# Altium PCB PCB1.PcbDoc
Units mm, origin at the board's own origin, x right, y up, seen from the top; angles counter-clockwise.
Board outline 114.13 x 114.13 mm, 2 copper layers (Top Layer, Bottom Layer); 39 components, 37 nets, 155 pads, 32 vias.
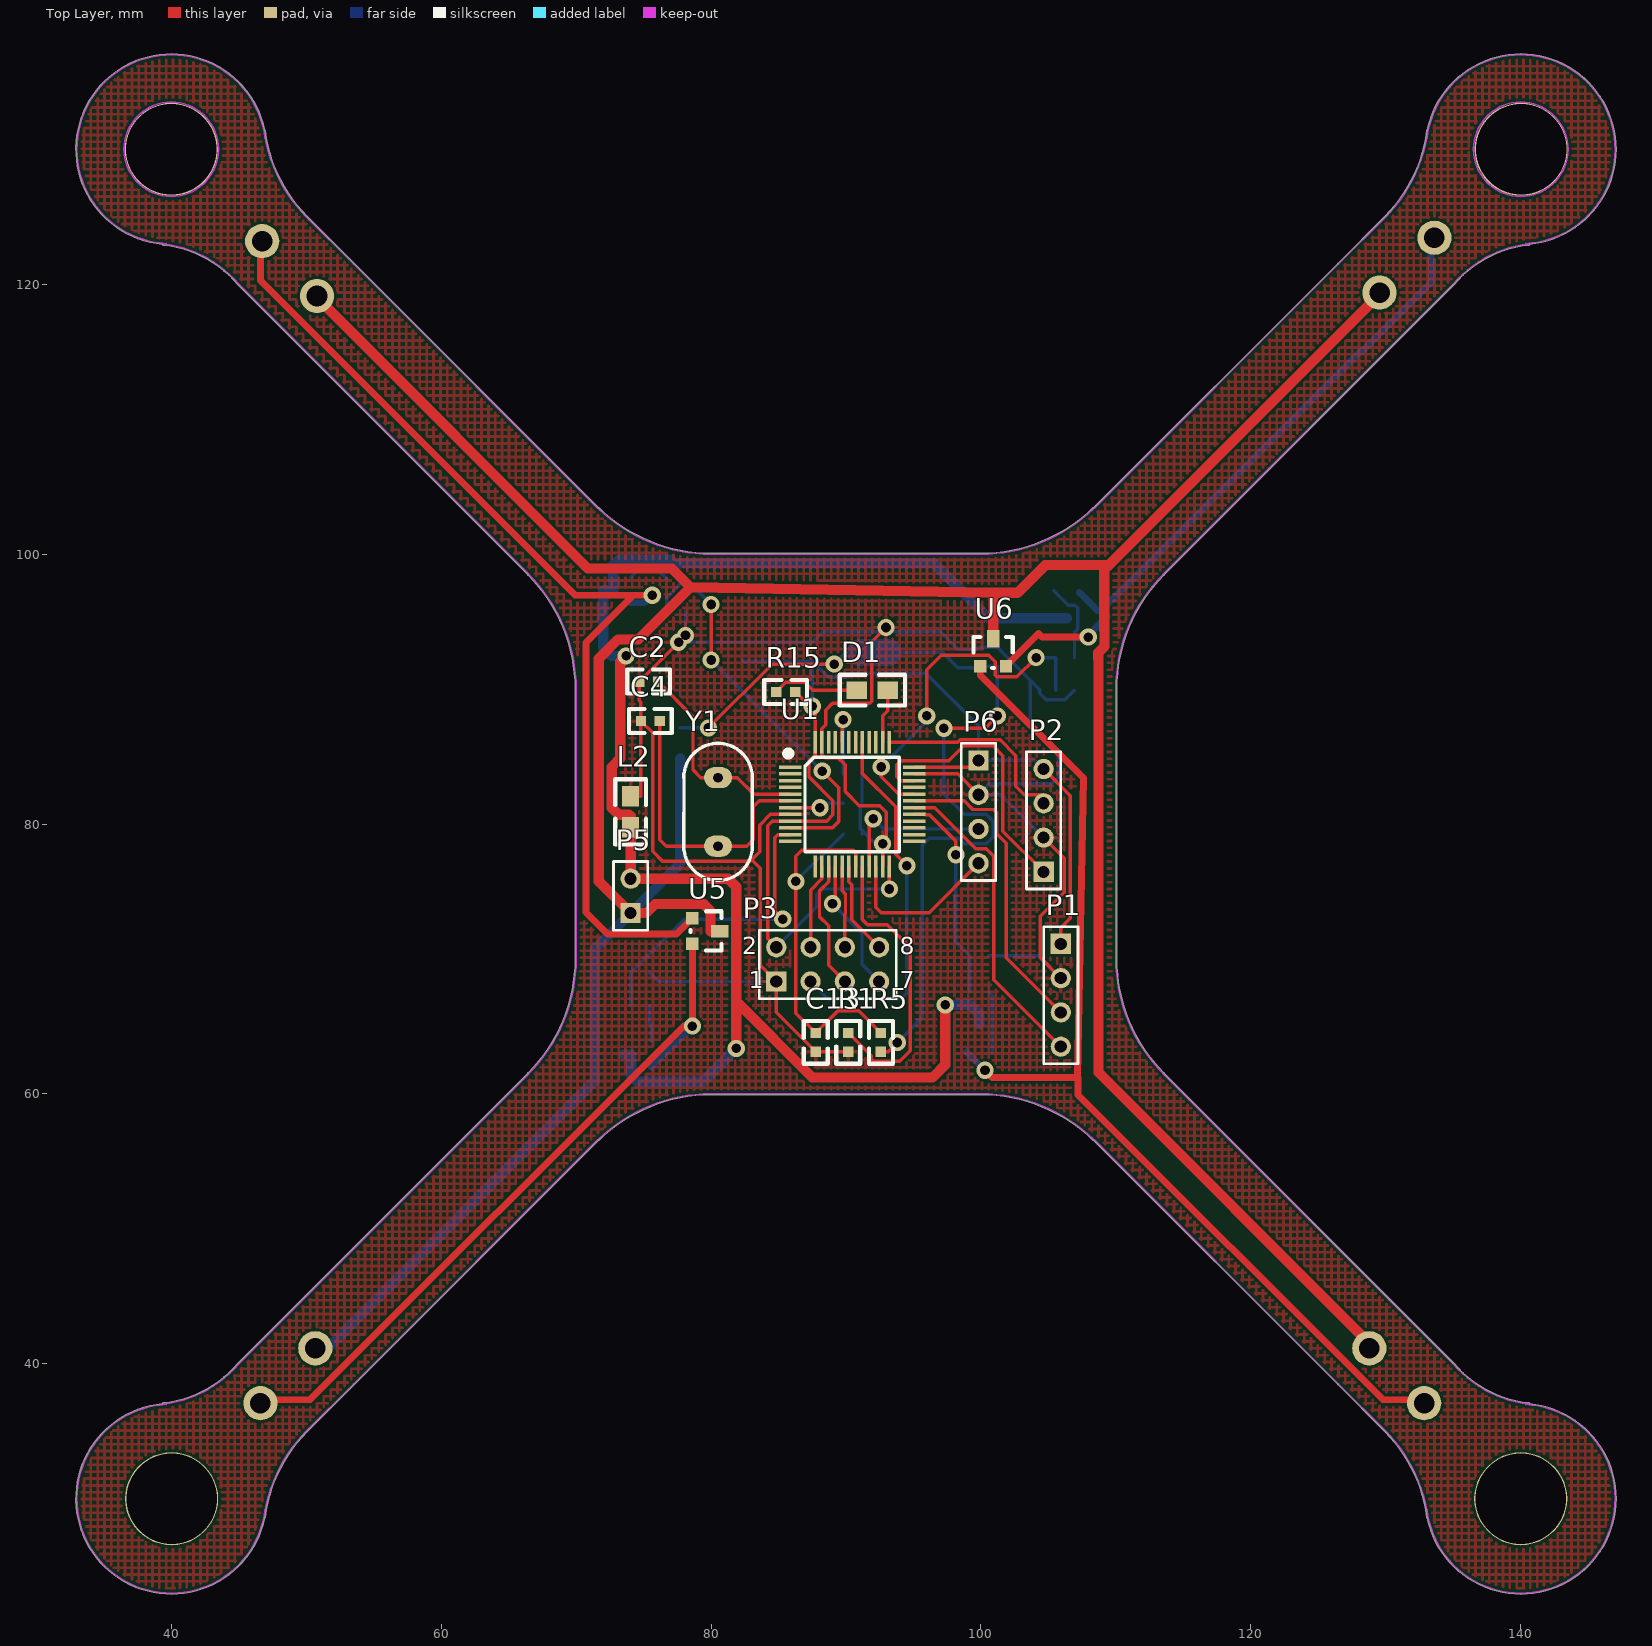
[diagram p0: Top Layer view]
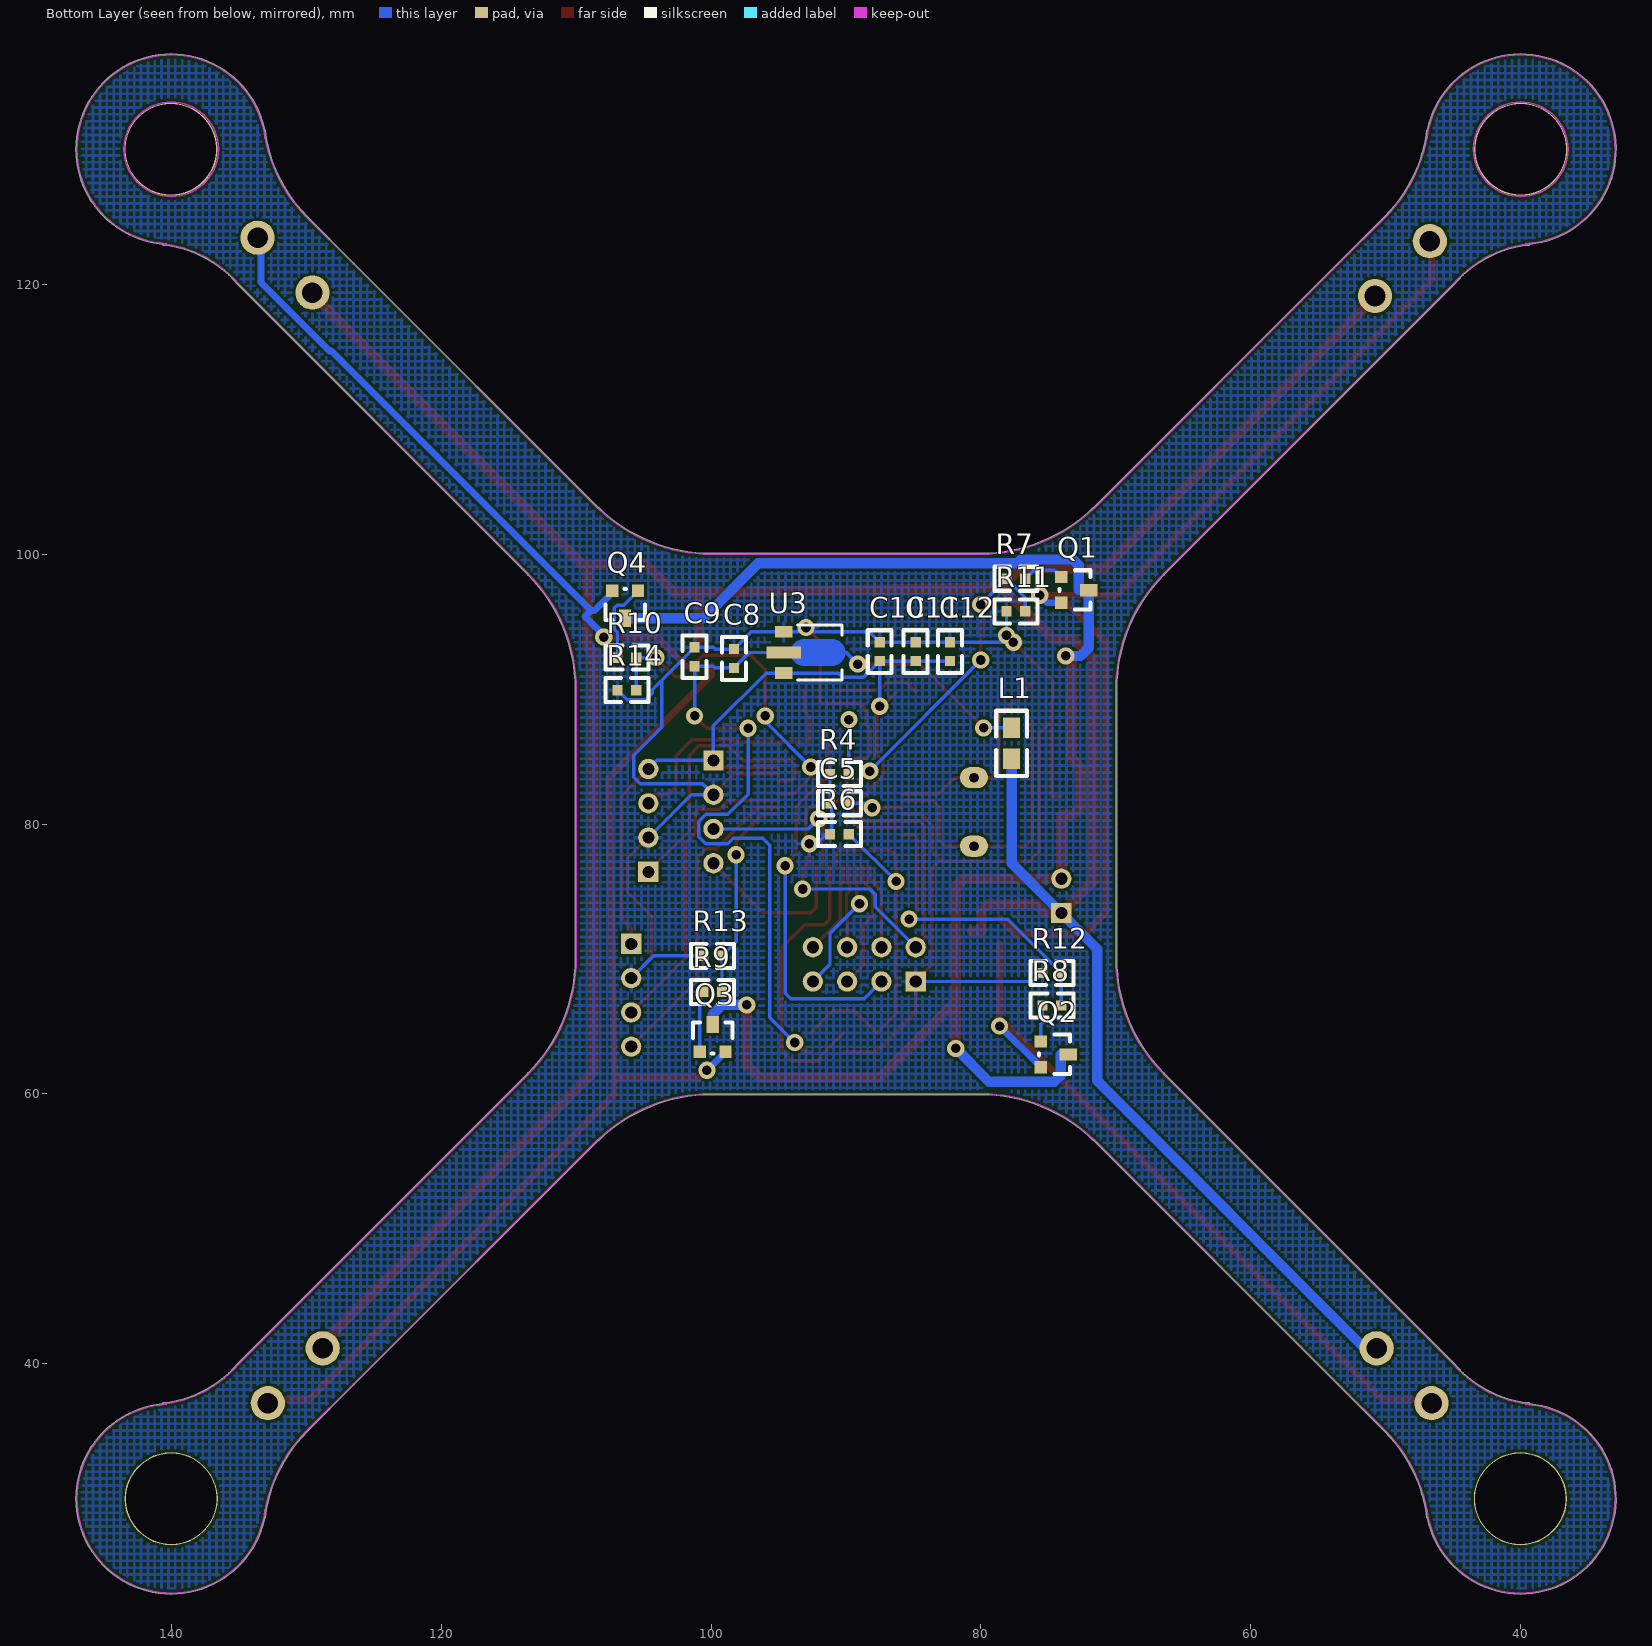
[diagram p1: Bottom Layer view, seen from below]

## Layer stack, top to bottom
Top Solder: solder mask 0.0102, Solder Resist, Dk 3.5
Top Layer: signal copper 0.0356
Dielectric 1: dielectric 0.32, FR-4, Dk 4.8
Bottom Layer: signal copper 0.0356
Bottom Solder: solder mask 0.0102, Solder Resist, Dk 3.5

## Board outline
39.333,37.032 ccw(c40,30) 46.92,28.583 ccw(c46.892,28.64) 46.955,28.632 cw(c57.9,27.2) 50.044,34.954 cw(c57.9,27.2) 50.045,34.955 71.636,56.545 ccw(c71.64,56.609) 71.685,56.563 cw(c80,48) 79.998,59.936 cw(c80,48) 80,59.936 cw(c80,60) 79.998,59.936 80,59.936 100,59.936 ccw(c100,60) 100.002,59.936 cw(c100,48) 108.315,56.563 ccw(c108.36,56.609) 108.364,56.545 126.455,38.455 129.955,34.955 ccw(c130,35) 129.956,34.954 cw(c122.1,27.2) 133.045,28.632 ccw(c133.108,28.64) 133.08,28.583 ccw(c140,30) 147.064,30 ccw(c140,30) 140.667,37.032 ccw(c140.603,37.033) 140.667,37.033 ccw(c140.603,37.033) 140.61,37.096 cw(c141.5,45.5) 135.049,40.041 ccw(c135,40) 135.045,40.045 113.581,61.51 ccw(c113.517,61.513) 113.581,61.513 ccw(c113.517,61.513) 113.562,61.558 cw(c122,70) 110.064,70 ccw(c110,70) 110.064,70.002 110.064,90 cw(c122,90) 113.562,98.442 ccw(c113.517,98.487) 113.581,98.487 ccw(c113.517,98.487) 113.581,98.49 135.044,119.954 ccw(c135,120) 135.049,119.959 cw(c141.5,114.5) 140.61,122.904 ccw(c140.603,122.967) 140.667,122.967 ccw(c140.603,122.967) 140.667,122.968 ccw(c140,130) 147.064,130 ccw(c140,130) 133.08,131.417 ccw(c133.108,131.36) 133.045,131.368 cw(c122.1,132.8) 129.955,125.046 cw(c122.1,132.8) 129.955,125.045 cw(c130,125) 129.955,125.046 129.955,125.045 126.455,121.545 108.364,103.455 ccw(c108.36,103.391) 108.315,103.437 cw(c100,112) 100.001,100.064 ccw(c100,100) 100,100.064 80,100.064 ccw(c80,100) 79.999,100.064 ccw(c80,112) 80,100.064 79.999,100.064 cw(c80,112) 71.685,103.437 ccw(c71.64,103.391) 71.636,103.455 50.045,125.045 ccw(c50,125) 50.045,125.045 cw(c57.9,132.8) 46.955,131.368 ccw(c46.892,131.36) 46.92,131.417 ccw(c40,130) 39.333,122.968 ccw(c39.397,122.967) 39.39,122.904 cw(c38.5,114.5) 44.951,119.959 ccw(c45,120) 44.956,119.954 44.955,119.955 44.956,119.954 66.419,98.49 ccw(c66.483,98.487) 66.438,98.442 cw(c58,90) 69.936,90 69.936,70 cw(c70,70) 69.936,70.001 69.936,70 cw(c58,70) 66.438,61.558 ccw(c66.483,61.513) 66.419,61.51 44.955,40.045 ccw(c45,40) 44.951,40.041 ccw(c38.5,45.5) 44.951,40.041 cw(c45,40) 44.955,40.045 44.951,40.041 cw(c38.5,45.5) 39.39,37.096 ccw(c39.397,37.033)

## Design rules (kind name [scope] priority, off if disabled: settings)
Clearance [All] p1: gap=0.198
PolygonConnect [All] p1: connectstyle=Relief reliefconductorwidth=0.254 reliefentries=4 polygonreliefangle="90 Angle" airgapwidth=0.254
RoutingVias [All] p1: holewidth=0.711 width=1.27 viastyle="Through Hole" minholewidth=0.711 minwidth=1.27 maxholewidth=0.711 maxwidth=1.27
SolderMaskExpansion [All] p1: expansion=0.102
UnpouredPolygon [All] p1: allowunpoured=FALSE
Width Width_5 [InNet('MOTO4')] p1: maxlimit=0.508 minlimit=0.508 preferedwidth=0.508
Width Width_4 [InNet('MOTO3')] p2: maxlimit=0.508 minlimit=0.508 preferedwidth=0.508
Width Width_3 [InNet('MOTO2')] p3: maxlimit=0.508 minlimit=0.508 preferedwidth=0.508
Width Width_2 [InNet('MOTO1')] p4: maxlimit=0.508 minlimit=0.508 preferedwidth=0.508
Width Width_1 [InNet('VCC_BAT')] p5: maxlimit=0.762 minlimit=0.762 preferedwidth=0.762
Width [InNet('GND_BAT')] p6: maxlimit=0.762 minlimit=0.762 preferedwidth=0.762
29 further rules are at their usual default settings.

## Components (designator, comment, footprint, x,y, rotation, side; value= is the part's Value field where it differs from the comment)
C2 "cap" 0603 74.676,90.551 r0 top
C4 "cap" 0603 74.803,87.63 r0 top
C5 "cap" 0603 91.186,81.534 r180 bottom
C8 "cap" 0603 98.298,92.964 r270 bottom
C9 "cap" 0603 101.219,93.091 r270 bottom
C10 "cap" 0603 87.503,93.472 r270 bottom
C11 "cap" 0603 84.836,93.472 r270 bottom
C12 "cap" 0603 82.296,93.472 r270 bottom
C13 "cap" 0603 87.757,63.119 r90 top
D1 "LED0" 0805 90.805,89.916 r0 top
L1 "Inductor" 0805 77.724,84.836 r90 bottom
L2 "Inductor10mH" 0805 74.041,82.042 r270 top
P1 "Header 4" HDR1X4 105.918,71.12 r270 top
P2 "Header 4" HDR1X4 104.648,76.454 r90 top
P3 "Header 4X2" HDR2X4 84.836,68.326 r0 top
P5 "Header 2" HDR1X2 74.041,73.406 r90 top
P6 "Header 4" HDR1X4 99.822,84.709 r270 top
Q1 "SI2302" SOT-23 74.041,98.298 r270 bottom
Q2 "SI2302" SOT-23 75.565,63.881 r270 bottom
Q3 "SI2302" SOT-23 100.838,63.119 r180 bottom
Q4 "SI2302" SOT-23 105.41,97.282 r0 bottom
R1 "res" 0603 90.17,64.516 r270 top
R4 "res" 0603 91.186,83.693 r180 bottom
R5 "res" 0603 92.583,63.119 r90 top
R6 "res" 0603 89.789,79.248 r0 bottom
R7 "res" 0603 78.105,98.171 r180 bottom
R8 "res" 0603 74.041,66.548 r0 bottom
R9 "res" 0603 99.187,67.564 r0 bottom
R10 "res" 0603 105.537,92.329 r0 bottom
R11 "res" 0603 78.105,95.758 r180 bottom
R12 "res" 0603 75.438,68.961 r180 bottom
R13 "res" 0603 100.584,70.231 r180 bottom
R14 "res" 0603 106.934,89.916 r180 bottom
R15 "res" 0603 86.233,89.789 r180 top
U1 "STM32F103C8T6" LQFP48S 85.852,84.201 r0 top
U3 "XC6203E" SOT-89 94.615,94.234 r270 bottom
U5 "BAT54C" SOT-23 78.613,73.025 r270 top
U6 "BAT54C" SOT-23 99.949,91.694 r0 top
Y1 "5032xtal" XTAL 80.518,80.899 r90 top

## Footprints (in the part's own frame and the unit in brackets; to place one, negate y for a bottom-side part, rotate by r counter-clockwise, add the part's x,y. Pads: shape width x height; smd on the part's side, far side on the other; paste and mask are expansions set on the pad)
0603 [mil]
  rect 30x30 smd: 1(0,0) 2(55,0)
  silkscreen extent -35,-35 90,35
0805 [mil]
  rect 60x50 smd: 1(0,0) 2(90,0)
  silkscreen extent -50,-45 140,45
HDR1X2 [mm] "Connector; Header; 2 Position"
  rect 1.5x1.5 hole 0.9: 1(0,0)
  round 1.5 hole 0.9: 2(2.54,0)
  silkscreen extent -1.27,-1.27 3.81,1.27
HDR1X4 [mm] "Connector; Header; 4 Position"
  rect 1.5x1.5 hole 0.9: 1(0,0)
  round 1.5 hole 0.9: 2(2.54,0) 3(5.08,0) 4(7.62,0)
  silkscreen extent -1.27,-1.27 8.89,1.27
HDR2X4 [mm] "Connector; Header; 4x2 Position"
  rect 1.5x1.5 hole 0.9: 1(0,0)
  round 1.5 hole 0.9: 2(0,2.54) 3(2.54,0) 4(2.54,2.54) 5(5.08,0) 6(5.08,2.54) 7(7.62,0) 8(7.62,2.54)
  silkscreen extent -1.27,-1.27 8.89,3.81
LQFP48S [mil] "DPIN-0.5"
  rect 65x10 smd: 1(0.42,0.29) 2(0.42,-19.39) 3(0.42,-39.08) 4(0.42,-58.76) 5(0.42,-78.45) 6(0.42,-98.13) 7(0.42,-117.82) 8(0.42,-137.5) 9(0.42,-157.19) 10(0.42,-176.87) 11(0.42,-196.56) 12(0.42,-216.24) 25(362.63,-216.24) 26(362.63,-196.56) 27(362.63,-176.87) 28(362.63,-157.19) 29(362.63,-137.5) 30(362.63,-117.82) 31(362.63,-98.13) 32(362.63,-78.45) 33(362.63,-58.76) 34(362.63,-39.08) 35(362.63,-19.39) 36(362.63,0.29)
  rect 10x65 smd: 13(73.26,-289.08) 14(92.94,-289.08) 15(112.63,-289.08) 16(132.31,-289.08) 17(152,-289.08) 18(171.68,-289.08) 19(191.37,-289.08) 20(211.05,-289.08) 21(230.74,-289.08) 22(250.42,-289.08) 23(270.11,-289.08) 24(289.79,-289.08) 37(289.79,73.13) 38(270.11,73.13) 39(250.42,73.13) 40(230.74,73.13) 41(211.05,73.13) 42(191.37,73.13) 43(171.68,73.13) 44(152,73.13) 45(132.31,73.13) 46(112.63,73.13) 47(92.94,73.13) 48(73.26,73.13)
  silkscreen extent -10,-246 319,46
SOT-23 [mil]
  rect 36x36 smd: 1(0,0) 2(75,0)
  rect 36x50 smd: 3(38,80)
  silkscreen extent -20,-5 95,85
SOT-89 [mil]
  rect 34x50 smd: 1(0,0) 3(120,0)
  rect 34x100 smd: 2(60,0)
  Top Layer lines w80: 60,140 60,62 60,60
  silkscreen extent -20,40 140,170
XTAL [mil]
  oval 62x82 hole 28: 1(-100,0) 2(100,0)
  silkscreen extent -200,-100 200,100

## Part data
D1: "Typical INFRARED GaAs LED"
L2: library part Inductor
P1 P2 P6: "Header, 4-Pin"
P3: "Header, 4-Pin, Dual row"
P5: "Header, 2-Pin"
U3: library part XC6203

## Free pads (board coordinates)
  round 2.54 hole 1.524: 0(46.609,37.084) 0(46.736,123.19) 0(128.778,41.148) 0(133.604,123.444) 1(50.673,41.148) 1(50.8,119.126) 1(129.54,119.38) 1(132.842,37.084)
  round 6.9 hole 6.7: 2(40.03,29.997) 3(140.005,29.997) 4(140.03,129.997) 5(40.005,129.997)

## Via types
v1: diameter 1.27, hole 0.711, Top Layer to Bottom Layer, 32 vias

## Nets (pads, with @x,y where several pads share a name; then routed paths per layer and width w, separated by ;. In a path a pad name is that pad's centre, name@x,y a point inside that pad or via, vN(x,y) a via of type N, cw(c..) or ccw(c..) an arc to the next point about the centre after c; other vN are vias at no path point)
3.3V: C10.2 C11.2 C12.2 P1.1 P2.4 P3.2 P6.1 R15.1 U1.9 U1.24 U1.36 U1.48 U3.3 | length 87.8
  Top Layer w0.254: P3.2 84.201,71.501 84.201,79.878 84.531,80.208 U1.9 88.565,80.208 89.027,80.67 89.027,81.737 87.261,83.504 87.261,84.695 87.713,85.148 U1.48 v1@87.713,88.309 ; R15.1 v1@87.713,88.309 ; v1(87.503,88.722) 87.713,88.512 v1@87.713,88.309 ; v1(93.213,75.184) U1.24 ; U1.36 99.321,84.208 P6.1 ; P2.4 106.627,82.095 106.627,73.003 105.918,72.294 P1.1
  Bottom Layer w0.254: C12.2 C11.2 C10.2 ; P3.2 87.823,73.853 87.823,74.778 88.229,75.184 v1(93.213,75.184) ; v1(87.503,88.722) C10.2 ; P2.4 104.013,84.709 P6.1 99.822,87.274 95.91,91.186 U3.3 90.557,91.186 90.246,90.876 88.702,90.876 C10.2
AD: C13.2 R5.2 R6.1 U1.19 | length 30.6
  Top Layer w0.254: U1.19 90.713,77.892 90.555,78.05 86.711,78.05 86.284,77.622 v1(86.284,75.743) 86.284,65.989 C13.2 89.408,66.167 90.932,66.167 R5.2
  Bottom Layer w0.254: v1(86.284,75.743) R6.1
GND: C2.1 C4.1 C5.1 C8.1 C9.1 C10.1 C11.1 C12.1 C13.1 L2.1 P1.2 P2.2 P3.1 P6.2 R1.2 R4.1 R6.2 R11.1 R12.1 R13.1 R14.1 U1.8 U1.23 U1.35 U1.47 U3.1 | length 176.4
  Top Layer w0.254: L2.1 74.803,82.042 C4.1 ; v1(78.105,93.98) v1(77.597,93.472) C2.1 74.676,89.154 74.803,89.027 C4.1 ; U1.8 84.391,80.708 83.596,79.913 83.596,77.932 83.02,77.356 ; R1.2 C13.1 84.836,66.04 P3.1 83.642,69.52 83.642,76.733 83.02,77.356 ; U1.23 v1@92.713,78.057 ; v1(92.713,78.537) v1@92.713,78.057 ; v1(92.964,94.564) 91.897,93.497 91.897,89.103 91.745,88.951 89.002,88.951 88.494,88.443 88.494,87.351 88.213,87.07 U1.47 88.213,85.141 88.455,84.899 89.408,84.899 89.931,84.375 89.931,82.406 90.981,81.356 92.507,81.356 92.989,80.874 92.989,78.334 v1@92.713,78.057 ; U1.35 98.283,83.708 P6.2 ; P2.2 106.175,77.467 106.175,74.942 104.391,73.157 104.391,70.107 P1.2 ; C4.1 75.667,86.766 75.667,77.978 76.403,77.241 82.906,77.241 83.02,77.356
  Bottom Layer w0.254: R12.1 76.073,68.326 P3.1 ; v1(77.597,93.472) C12.1 C11.1 C10.1 88.265,94.234 v1@93.294,94.234 ; v1(78.105,93.98) R11.1 ; R6.2 R6.2@91.186,79.532 ; R4.1 C5.1 91.186,81.371 91.064,81.371 91.064,79.654 R6.2@91.186,79.532 ; v1(92.713,78.537) 92.182,78.537 R6.2@91.186,79.532 ; v1(92.964,94.564) v1@93.294,94.234 ; R13.1 104.267,70.231 P1.2 ; P2.2 101.473,82.169 P6.2 100.635,82.982 105.258,82.982 105.74,83.464 105.74,85.09 103.657,87.173 103.657,90.653 ; R14.1 106.223,89.205 104.851,89.205 104.369,89.687 104.369,89.941 103.657,90.653 ; v1@93.294,94.234 U3.1 97.028,94.234 C8.1 99.695,92.964 99.822,93.091 C9.1 103.657,90.653
GND_BAT: L2.2 P5.2 Q1.3 Q2.3 Q3.3 Q4.3 | length 119.6
  Top Layer w0.762: v1(73.711,92.456) 73.279,92.024 73.279,84.861 72.644,84.226 72.644,81.204 73.152,80.696 73.914,80.696 74.041,80.569 L2.2 P5.2 81.28,75.946 81.864,75.362 81.864,66.853 87.503,61.214 96.418,61.214 97.358,62.154 v1(97.358,66.599) ; v1(81.864,63.373) 81.864,66.726
  Bottom Layer w0.762: Q2.3 74.092,62.916 74.092,61.366 74.549,60.909 79.4,60.909 v1(81.864,63.373) ; v1(73.711,92.456) 72.619,92.456 72.009,93.066 Q1.3 72.746,97.333 72.746,99.187 73.152,99.593 77.064,99.593 77.343,99.314 96.495,99.314 100.559,95.25 Q4.3 ; v1(97.358,66.599) 99.162,66.599 99.873,65.888 Q3.3
LED1: D1.2 U1.38 | length 4
  Top Layer w0.254: U1.38 92.713,88.011 93.091,88.389 D1.2
MISO: P3.7 U1.16 | length 10.1
  Top Layer w0.254: v1(89.002,74.092) 89.213,74.303 U1.16
  Bottom Layer w0.254: v1(89.002,74.092) 91.186,71.907 91.186,69.596 P3.7
MOSI: P3.6 U1.17 | length 6.1
  Top Layer w0.254: U1.17 89.713,75.052 89.962,74.803 89.962,73.34 89.916,73.295 P3.6
MOTO1: pad.0@46.736,123.19 Q1.2 U5.1 | length 77.4
  Top Layer w0.508: pad.0@46.609,123.19 46.609,120.269 69.926,96.952 74.254,96.952 ; v1(75.641,96.952) 74.254,96.952 ; U5.1 77.445,71.857 72.339,71.857 70.739,73.457 70.739,93.436 74.254,96.952
  Bottom Layer w0.508: Q1.2 75.082,96.393 v1(75.641,96.952)
MOTO2: pad.0@46.609,37.084 Q2.2 U5.2 | length 53.7
  Top Layer w0.508: pad.0@46.863,37.084 47.117,37.338 50.292,37.338 77.978,65.024 v1(78.613,65.024) U5.2
  Bottom Layer w0.508: Q2.2 v1(78.613,65.024)
MOTO3: pad.1@132.842,37.084 Q3.2 U6.1 | length 79.2
  Top Layer w0.508: U6.1 99.949,91.053 107.598,83.404 107.157,61.263 107.204,61.214 ; v1(100.305,61.747) 100.838,61.214 107.204,61.214 ; pad.1@132.842,36.957 132.461,37.338 129.794,37.338 107.204,59.928 107.204,61.214
  Bottom Layer w0.508: Q3.2 v1(100.305,61.747)
MOTO4: pad.0@133.604,123.444 Q4.2 U6.2 | length 50.1
  Top Layer w0.508: U6.2 104.267,94.107 104.521,93.853 v1(107.95,93.853)
  Bottom Layer w0.508: Q4.2@107.315,97.155 108.648,95.822 108.902,95.822 ; v1(107.95,93.853) 107.95,93.98 109.347,95.377 108.902,95.822 ; pad.0@133.604,123.571 133.35,123.317 133.35,120.142 128.27,115.062 128.143,115.062 108.902,95.822
NetC2_2: C2.2 U1.5 Y1.2 | length 15.6
  Top Layer w0.254: C2.2 78.664,87.96 78.664,84.023 79.248,83.439 Y1.2 81.954,83.439 83.185,82.208 U1.5
NetC4_2: C4.2 U1.6 Y1.1 | length 21.5
  Top Layer w0.254: C4.2 76.2,78.842 76.683,78.359 Y1.1 82.652,78.359 83.134,78.842 83.134,81.28 83.563,81.708 U1.6
NetD1_1: D1.1 R15.2 | length 6.5
  Top Layer w0.254: R15.2 85.547,90.5 86.944,90.5 87.528,89.916 D1.1
NetQ1_G: Q1.1 R7.2 | length 3.1
  Bottom Layer w0.254: Q1.1 74.555,98.812 76.067,98.812 R7.2
NetQ2_G: Q2.1 R8.2 | length 2.7
  Bottom Layer w0.254: R8.2 75.438,65.278 75.565,65.151 Q2.1
NetQ3_G: Q3.1 R9.2 | length 4.6
  Bottom Layer w0.254: R9.2 100.838,67.31 Q3.1
NetQ4_G: Q4.1 R10.2 | length 6.1
  Bottom Layer w0.254: Q4.1 106.482,96.21 106.967,96.21 107.163,96.015 107.163,94.423 106.934,94.195 R10.2
NetR1_1: R1.1 U1.20 | length 21.9
  Top Layer w0.254: R1.1 91.872,62.814 91.872,62.586 92.05,62.408 93.97,62.408 94.762,63.2 94.762,70.846 93.066,72.542 91.592,72.542 91.213,72.922 U1.20
NetR4_2: R4.2 U1.44 | length 5.7
  Top Layer w0.254: U1.44 89.713,87.655 v1(89.789,87.732)
  Bottom Layer w0.254: R4.2 v1(89.789,87.732)
NRST: C5.2 U1.7 | length 4.1
  Top Layer w0.254: U1.7 v1(88.062,81.208)
  Bottom Layer w0.254: v1(88.062,81.208) 88.387,81.534 C5.2
PWM1: R7.1 R11.2 U1.10 | length 29.5
  Top Layer w0.254: v1(80.01,92.151) v1(80.01,96.266) ; U1.10 89.002,79.708 89.479,80.186 89.479,82.682 v1(88.24,83.922)
  Bottom Layer w0.254: R11.2 76.708,96.774 R7.1 v1(80.01,96.266) ; v1(80.01,92.151) v1(88.24,83.922)
PWM2: R8.1 R12.2 U1.11 | length 22.9
  Top Layer w0.254: v1(85.319,72.949) 84.709,73.558 84.709,78.98 84.938,79.208 U1.11
  Bottom Layer w0.254: R8.1 R12.2 78.029,72.949 v1(85.319,72.949)
PWM3: R9.1 R13.2 U1.29 | length 15.5
  Top Layer w0.254: U1.29 95.885,80.708 95.885,80.696 96.19,80.696 98.146,78.74 v1(98.146,77.724)
  Bottom Layer w0.254: v1(98.146,77.724) 98.146,71.272 R13.2 R9.1
PWM4: R10.1 R14.2 U1.32 | length 26.6
  Top Layer w0.254: v1(92.608,84.226) 92.608,83.515 93.915,82.208 U1.32 ; v1(95.987,88.011) 95.987,91.44 97.053,92.507 100.584,92.507 101.053,92.038 101.053,91.034 101.18,90.907 102.667,90.907 v1(104.089,92.329)
  Bottom Layer w0.254: v1(92.608,84.226) 95.987,87.605 v1(95.987,88.011) ; v1(104.089,92.329) R10.1 R14.2
RX1: P1.3 U1.31 | length 23.3
  Top Layer w0.254: U1.31 98.748,81.708 99.38,81.077 100.965,81.077 101.168,80.874 101.168,79.273 101.884,78.558 101.884,70.074 P1.3
SCL: P6.3 U1.21 | length 11.8
  Top Layer w0.254: U1.21 91.713,80.08 v1(92.024,80.391)
  Bottom Layer w0.254: v1(92.024,80.391) 92.786,79.629 P6.3
SDA: P6.4 U1.22 | length 12.3
  Top Layer w0.254: U1.22 92.213,73.827 92.607,73.433 96.166,73.433 P6.4
SWCLK: P2.3 U1.37 | length 15.2
  Top Layer w0.254: U1.37 93.213,86.055 98.295,86.055 98.476,86.236 101.419,86.236 102.594,85.062 102.594,82.789 103.226,82.157 104.648,82.157 P2.3
SWDIO: P2.1 U1.34 | length 20.9
  Top Layer w0.254: U1.34 94.082,83.208 93.777,83.513 93.777,84.379 94.082,84.684 97.629,84.684 98.73,85.784 100.914,85.784 101.628,85.07 101.628,79.474 P2.1
TX1: P1.4 U1.30 | length 23.6
  Top Layer w0.254: U1.30 96.577,81.208 99.604,78.181 100.406,78.181 100.965,77.622 100.965,68.453 P1.4
VCC: C8.2 C9.2 L1.2 R5.1 U3.2 | length 65.6
  Top Layer w0.254: v1(79.807,87.122) 84.531,91.846 v1(89.129,91.846) ; R5.1 93.116,63.119 v1(93.802,63.805) ; v1(97.257,87.097) 100.305,87.097 v1(101.219,88.011)
  Bottom Layer w0.254: L1.2 v1(79.807,87.122) ; v1(89.129,91.846) 89.992,92.71 91.059,92.71 ; 93.091,92.71 U3.2 97.155,92.71 C8.2 99.695,91.567 99.822,91.694 C9.2 v1(101.219,88.011) ; v1(93.802,63.805) 95.656,65.659 95.656,78.435 96.164,78.943 98.349,78.943 98.755,78.537 100.381,78.537 100.914,79.07 100.914,80.188 100.381,80.721 98.755,80.721 97.257,82.22 v1(97.257,87.097)
VCC_BAT: L1.1 P5.1 pad.0@128.778,41.148 pad.1@50.8,119.126 pad.1@50.673,41.148 pad.1@129.54,119.38 U5.3 U6.3 | length 259.5
  Top Layer w0.762: pad.1@50.673,118.364 51.435,118.364 70.866,98.933 77.082,98.933 78.479,97.536 ; U5.3 79.959,72.06 79.959,73.558 79.451,74.066 75.844,74.066 75.184,73.406 P5.1 71.684,75.763 71.684,92.253 73.101,93.67 74.613,93.67 78.479,97.536 ; U6.3 100.914,97.13 ; 109.144,99.187 109.144,94.376 109.164,94.356 109.164,93.162 108.687,92.685 108.687,92.227 108.712,92.202 108.712,61.595 128.778,41.529 pad.0@128.778,41.148 ; 109.347,99.06 pad.1@129.667,119.38 ; 109.474,99.187 104.775,99.187 102.718,97.13 100.914,97.13 ; 78.479,97.536 100.914,97.13
  Bottom Layer w0.762: pad.1@50.927,41.275 51.689,41.275 71.374,60.96 71.374,70.739 P5.1 77.724,77.089 L1.1
W_CE: P3.3 U1.41 | length 27.8
  Top Layer w0.254: U1.41 91.213,83.742 93.675,81.28 93.675,77.749 v1(94.513,76.911)
  Bottom Layer w0.254: P3.3 88.646,67.056 94.107,67.056 94.513,67.462 v1(94.513,76.911)
W_CSN: P3.4 U1.14 | length 6.3
  Top Layer w0.254: P3.4 87.376,75.103 88.213,75.94 U1.14
W_IRQ: P3.8 U1.18 | length 6.9
  Top Layer w0.254: U1.18 90.213,75.713 90.414,75.512 90.414,72.908 P3.8
W_SCK: P3.5 U1.15 | length 9.6
  Top Layer w0.254: U1.15 88.713,75.733 88.037,75.057 88.037,73.137 88.713,72.462 88.713,69.529 P3.5
pads on no net: U1.1 U1.2 U1.3 U1.4 U1.12 U1.13 U1.25 U1.26 U1.27 U1.28 U1.33 U1.39 U1.40 U1.42 U1.43 U1.45 U1.46

## Polygon pours and split planes (outlines as drawn)
GND on Top Layer "Top Layer-No Net" (hatched 90Degree grid 0.508 track 0.203, remove dead copper, pour order 8): 21.819,145.491 22.708,144.602 22.708,14.199 161.646,14.199 167.488,20.041 158.979,28.55 158.979,147.091
GND on Bottom Layer "Top Layer-No Net" (hatched 90Degree grid 0.508 track 0.203, remove dead copper, pour order 10): 22.174,142.138 22.174,9.754 23.419,8.509 23.774,8.865 166.98,8.865 166.98,139.268 159.156,147.091

## Keep-outs
Keep-Out Layer:
  circle w0.127: c40,130 r3.5
  circle w0.127: c140,130 r3.5
  lines w0.127: 39.397,37.033 ccw(c38.5,45.5) 45,40 66.5,61.5 ; 39.397,122.967 cw(c38.5,114.5) 45,120 66.5,98.5 ; 39.628,36.99 ccw(c40,30) 46.951,29.17 ; 39.628,123.01 cw(c40,130) 46.951,130.83 ; 46.892,28.64 cw(c57.9,27.2) 50,35 53.5,38.5 71.6,56.6 ; 46.892,131.36 ccw(c57.9,132.8) 50,125 53.5,121.5 71.6,103.4 ; 66.483,61.513 ccw(c58,70) 70,70 ; 66.483,98.487 cw(c58,90) 70,90 ; 71.64,56.609 cw(c80,48) 80,60 100,60 cw(c100,48) 108.36,56.609 ; 71.64,103.391 ccw(c80,112) 80,100 100,100 ccw(c100,112) 108.36,103.391 ; 108.4,56.6 126.5,38.5 130,35 cw(c122.1,27.2) 133.108,28.64 ; 108.4,103.4 126.5,121.5 130,125 ccw(c122.1,132.8) 133.108,131.36 ; 113.5,61.5 135,40 ccw(c141.5,45.5) 140.603,37.033 ; 113.5,98.5 135,120 cw(c141.5,114.5) 140.603,122.967 ; 113.517,61.513 cw(c122,70) 110,70 ; 113.517,98.487 ccw(c122,90) 110,90 ; 133.049,29.17 ccw(c140,30) 140.372,36.99 ; 133.049,130.83 cw(c140,130) 140.372,123.01 ; 70,70 70,90 ; 70,70 70,90 ; 110,70 110,90 ; 110,70 110,90

## Text inside footprints (layer, text, board x,y; h text height)
P3: Top Overlay "2" at 82.296,70.358 h1.27; Top Overlay "1" at 82.804,67.818 h1.27; Top Overlay "7" at 93.98,67.818 h1.27; Top Overlay "8" at 93.98,70.358 h1.27